# EAGLE board PPS_schematic (EAGLE 9.6.2)

Size 100 x 80 mm. Coordinates in mm from the lower left corner, seen from the top.
Outline: 0,0 100,0 100,80 0,80 0,0
Copper layers (1*16): Top 0.035mm / dielectric 1.5mm / Bottom 0.035mm
Design rules "default": minimum track width 6mil, minimum drill 0.35mm, track to track 6mil, track to pad 6mil, pad to pad 6mil, via to via 6mil, smd to smd 6mil, copper to edge 40mil, drill to drill 6mil, minimum pad ring 10mil, minimum via ring 8mil, stop-mask expansion 4mil, vias tented up to drill 0mil, thermal gap 10mil

## Footprints (pad centres in the part's own frame; a part is rotated, then mirrored left to right if it is on the bottom)
691137710002 = drill 1.3: 1 -2.5,0; 2 2.5,0
CON3_1X3_TU_HTS_SAI = drill 0.711 pad 1.27: 1 -2.54,0; 2 0,0; 3 2.54,0
CONN_PPTC031_SUL = drill 1.016 pad 1.524: 1 0,0; 2 -2.54,0; 3 -5.08,0
3,0-PAD = drill 3 pad 5.842: B3,0 0,0
HARWIN_M20-7821146 = drill 1 square: 1 12.7,0 | drill 1: 2 10.16,0; 3 7.62,0; 4 5.08,0; 5 2.54,0; 6 0,0; 7 -2.54,0; 8 -5.08,0; 9 -7.62,0; 10 -10.16,0; 11 -12.7,0
M1206 = smd 1.6 x 2: 1 -1.4,0; 2 1.4,0

## Placement (x,y rotation side)
BATTERIES  691137710002  [691137710002]  -74.93,73.66 0 top  (outside the outline)
BOOSTER  TS-103-T-ACON3_1X3_TU_HTS_SAI  [CON3_1X3_TU_HTS_SAI]  -43.18,76.2 0 top  (outside the outline)
D0-METER-V3.0  PPTC031LFBN-RCCONN_PPTC031_SUL  [CONN_PPTC031_SUL]  -44.45,20.32 0 top  (outside the outline)
DS18B20  PPTC031LFBN-RCCONN_PPTC031_SUL  [CONN_PPTC031_SUL]  -44.45,53.34 0 top  (outside the outline)
H1  MOUNT-PAD-ROUND3.0  [3,0-PAD]  -85.09,71.12 0 top  (outside the outline)
H2  MOUNT-PAD-ROUND3.0  [3,0-PAD]  93.98,5.08 0 top
H3  MOUNT-PAD-ROUND3.0  [3,0-PAD]  -26.67,95.25 0 top  (outside the outline)
H4  MOUNT-PAD-ROUND3.0  [3,0-PAD]  6.35,73.66 0 top
J3  M20-7821146  [HARWIN_M20-7821146]  -54.61,93.98 0 top  (outside the outline)
J4  M20-7821146  [HARWIN_M20-7821146]  -27.94,102.87 0 top  (outside the outline)
R1  4.7k  [M1206]  -45.72,102.87 0 top  (outside the outline)

## Library data of the parts
BATTERIES = 691137710002; DATASHEET-URL: https://www.we-online.com/catalog/datasheet/691137710002.pdf; IR-UL: 16A; IR-VDE: 24A; MOUNT: THT; PART-NUMBER: 691137710002; PINS: 2; PITCH: 5mm; TYPE: Horizontal; WIRE: 12 to 30 (AWG) 3.31 to 0.05 (mm²); WORKING-VOLTAGE-UL: 300V(AC); WORKING-VOLTAGE-VDE: 250V(AC)
BOOSTER = 2024-10-23_16-09-23_Library; COPYRIGHT: Copyright (C) 2024 Ultra Librarian. All rights reserved.; MANUFACTURER_PART_NUMBER: TS-103-T-A; MFR_NAME: Samtec Inc
D0-METER-V3.0 DS18B20 = 2024-10-23_16-02-51_Library; COPYRIGHT: Copyright (C) 2024 Ultra Librarian. All rights reserved.; MANUFACTURER_PART_NUMBER: PPTC031LFBN-RC; MFR_NAME: Sullins
H1-H4 = holes
J3 J4 = M20-7821146; MANUFACTURER: HARWIN; STANDARD: Manufacturer Recommendations
R1 = 1_TGE

## Nets
3V3: J4.9
A0: J3.6
A1: D0-METER-V3.0.3 J3.5
A2: J3.4
A3: J3.3
A4: J3.2
A5: J3.1
D2: J4.1
D3: J4.2
D4: J4.3
D5: J4.4
D6: J4.5
D7: J4.6
D8: J4.7
D9: DS18B20.2 J4.8 R1.2
D10: J3.7
D11: J3.8
D12: J3.9
D13: J3.10
GND: BATTERIES.1 BOOSTER.2 D0-METER-V3.0.1 DS18B20.1 H1.B3,0 H2.B3,0 H3.B3,0 H4.B3,0 J4.10
RST: J3.11
VBAT: BATTERIES.2 BOOSTER.3
VCC: BOOSTER.1 D0-METER-V3.0.2 DS18B20.3 J4.11 R1.1

## Tracks (layer width: path | path; a pad name or v marks a point on that pad's centre or on a via)
A1  (1 unrouted)
D9  (2 unrouted)
GND  (8 unrouted)
VBAT  (1 unrouted)
VCC  (4 unrouted)